# Altium PCB uMultimeter_ExpBreadBoard_Pcb.PcbDoc
Units mil, origin at the board's own origin, x right, y up, seen from the top; angles counter-clockwise.
Board outline 2100 x 2035 mil, 2 copper layers (Top Layer, Bottom Layer); 13 components, 23 nets, 65 pads, 6 vias.
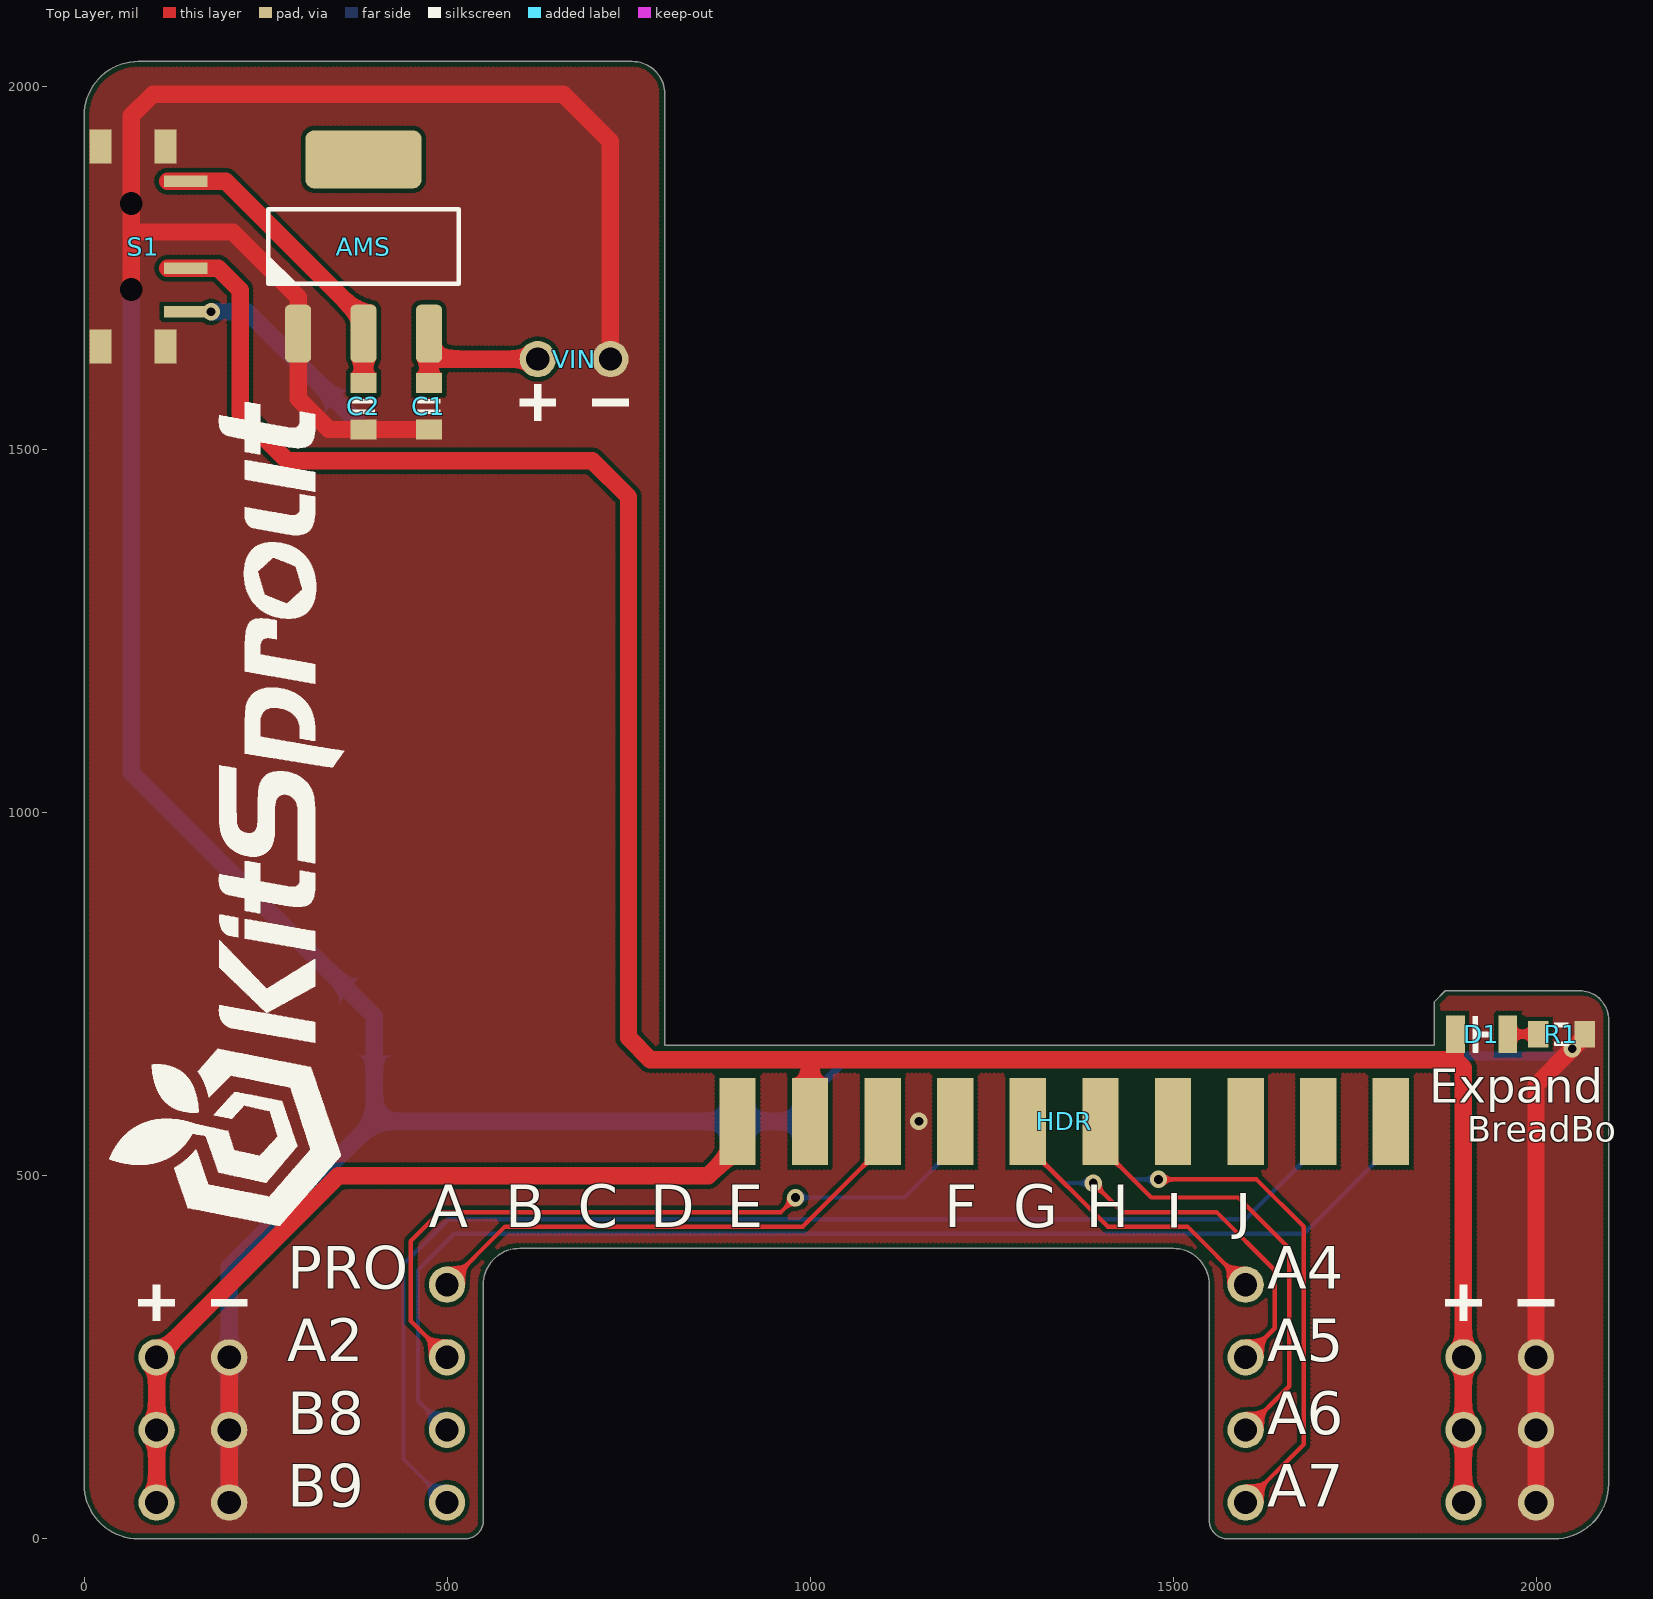
[diagram p0: Top Layer view]
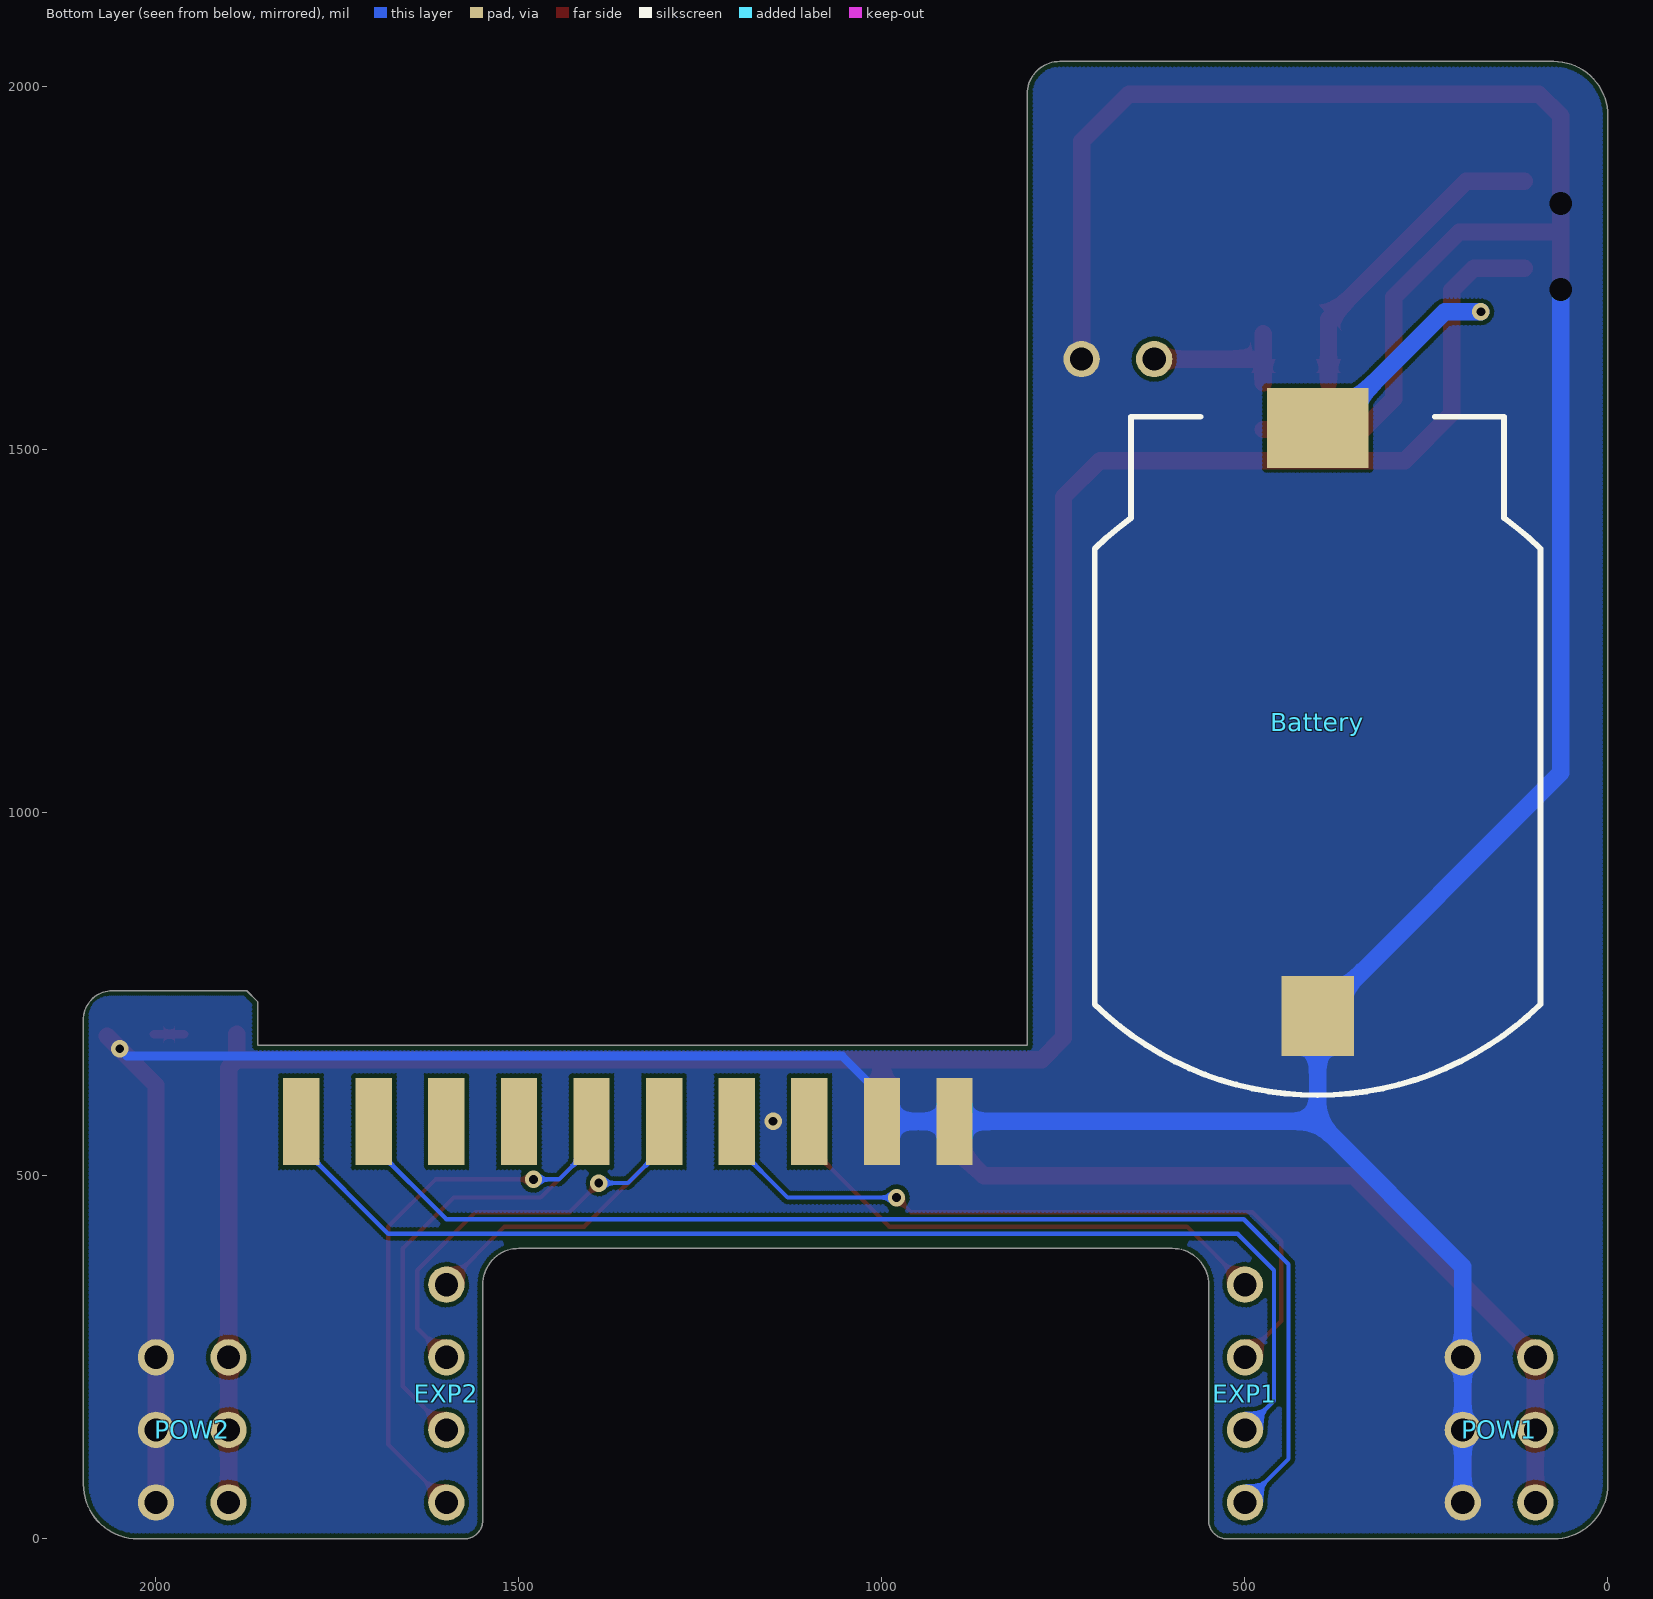
[diagram p1: Bottom Layer view, seen from below]
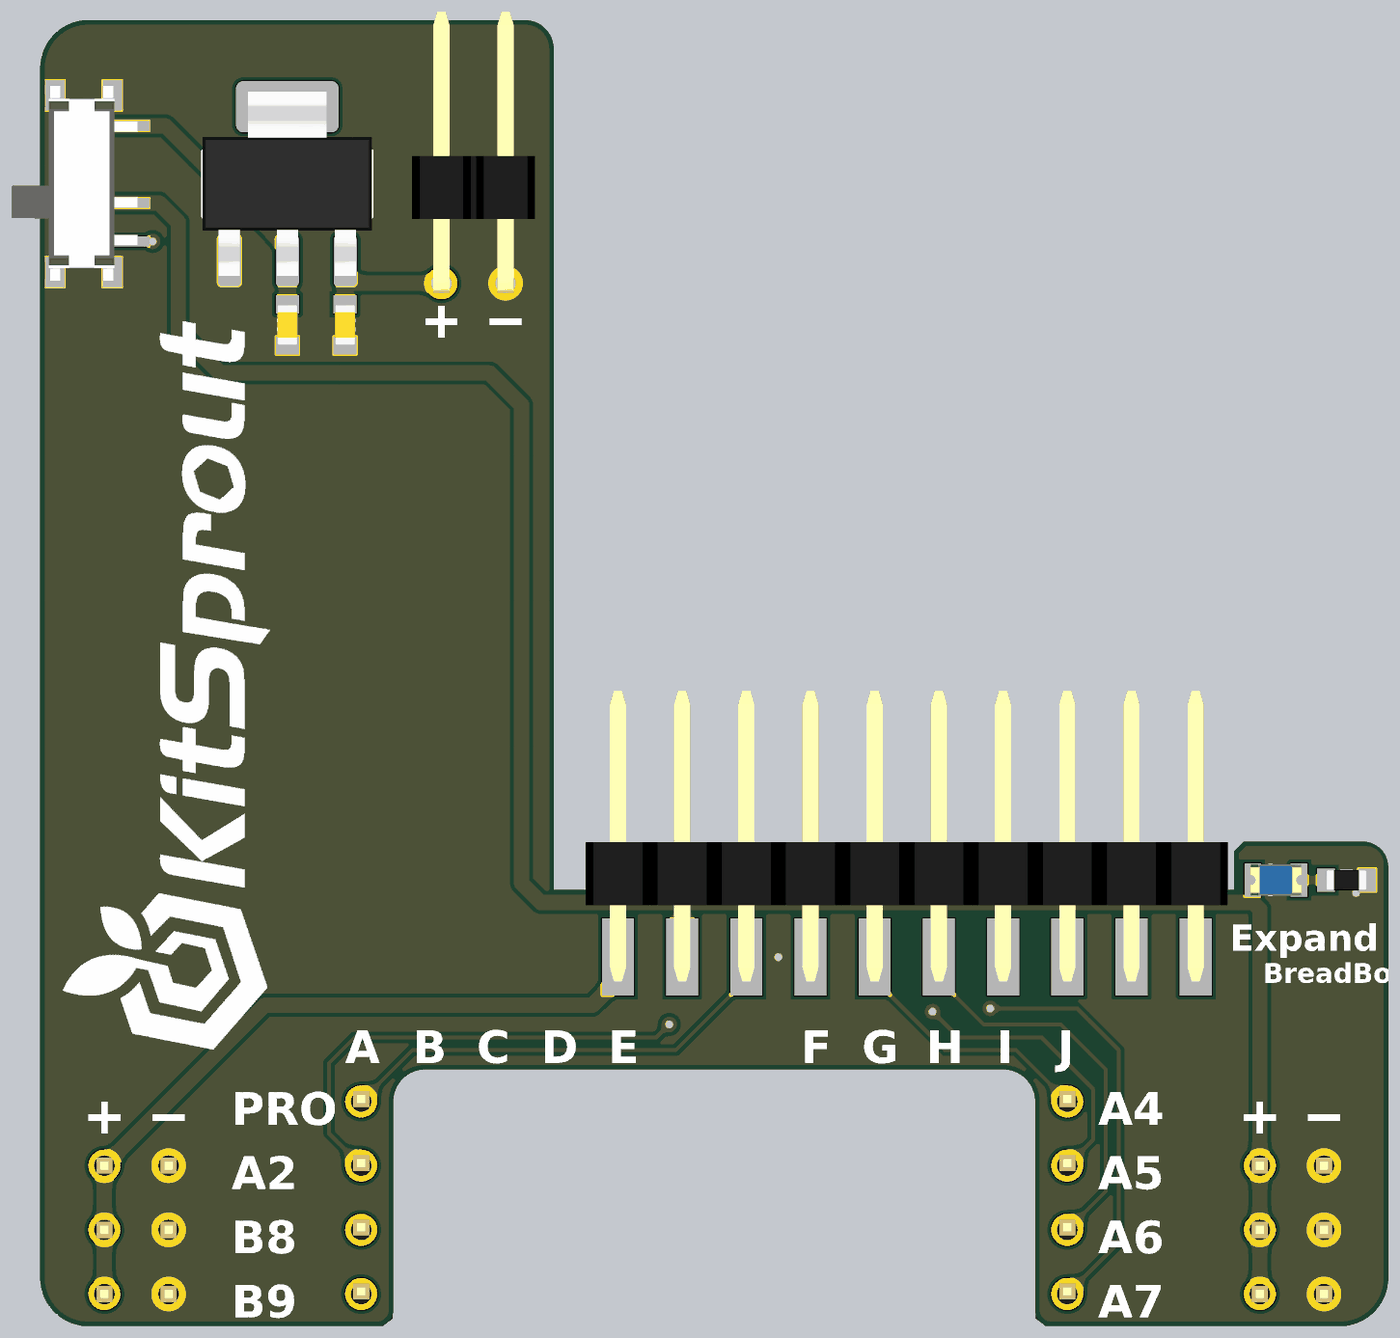
[diagram p2: 3D render of the assembled board from above, using the file's embedded part models]
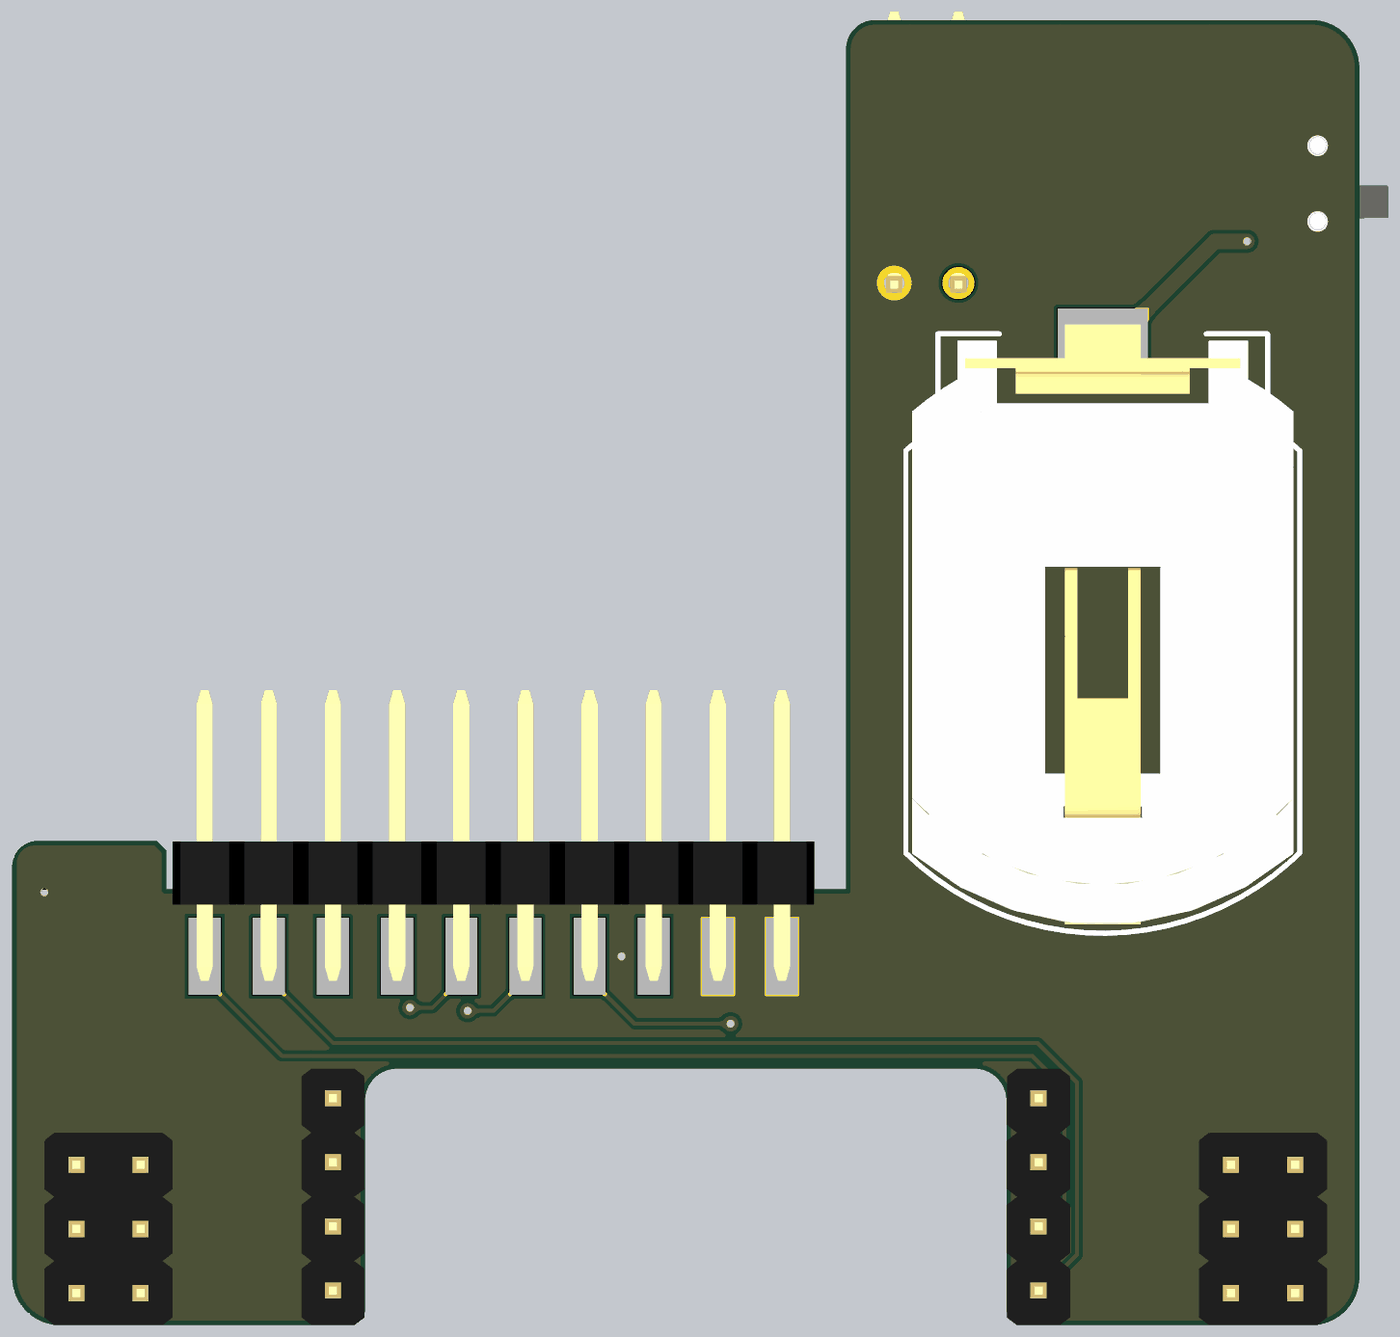
[diagram p3: 3D render of the assembled board from below, using the file's embedded part models]

## Layer stack, top to bottom
Top Solder: solder mask 0.4, Solder Resist, Dk 3.5
Top Layer: signal copper 1.4
Dielectric 1: dielectric 12.6, FR-4, Dk 4.8
Bottom Layer: signal copper 1.4
Bottom Solder: solder mask 0.4, Solder Resist, Dk 3.5

## Board outline
0,75 ccw(c75,75) 75,0 525,0 ccw(c525,25) 550,25 550,350 cw(c600,350) 600,400 1500,400 cw(c1500,350) 1550,350 1550,25 ccw(c1575,25) 1575,0 2025,0 ccw(c2025,75) 2100,75 2100,715 ccw(c2060,715) 2060,755 1875,755 1860,740 1860,680 800,680 800,1990 ccw(c755,1990) 755,2035 75,2035 ccw(c75,1960) 0,1960

## Design rules (kind name [scope] priority, off if disabled: settings)
Clearance ClearancePolygon [InPolygon] p1: gap=6
Clearance [All] p2: gap=6
ComponentClearance [All] p1: gap=0 collisioncheckmode=3 verticalgap=0 showdistances=FALSE
Height [All] p1: minheight=0 maxheight=5000 prefheight=500
HoleSize [All] p1: absolutevalues=TRUE maxlimit=200 minlimit=1 maxpercent=80.000 minpercent=20.000
HoleToHoleClearance [All] p1: gap=6 allowstackedmicrovias=TRUE
MinimumSolderMaskSliver [All] p1: minsoldermaskwidth=0
PolygonConnect [All] p1: connectstyle=Direct reliefconductorwidth=10 reliefentries=4 polygonreliefangle="90 Angle" airgapwidth=10
RoutingVias [All] p1: holewidth=12 width=24 viastyle="Through Hole" minholewidth=12 minwidth=20 maxholewidth=28 maxwidth=50
SilkToSilkClearance [All] p1: silktosilkclearance=0
SilkToSolderMaskClearance [IsPad] p1: minsilkscreentomaskgap=0 clearancetoexposedcopper=TRUE
SolderMaskExpansion [All] p1: expansion=2
Width [All] p1: maxlimit=50 minlimit=6 preferedwidth=10
23 further rules are at their usual default settings.

## Classes and differential pairs
component class EXP: HDR
component class uMultimeter_ExpBreadBoard_Sch: AMS Battery C1 C2 D1 EXP1 EXP2 POW1 POW2 R1 S1 VIN

## Components (designator, comment, footprint, x,y, rotation, side; value= is the part's Value field where it differs from the comment)
AMS "AMS1117" SOT223-3 385,1780 r0 top
Battery "Battery" CR2032-1 400,1050 r90 bottom locked
C1 "Cap_0603" CAP_0603 475,1560 r90 top
C2 "Cap_0603" CAP_0603 385,1560 r90 top
D1 "LED_0805" LED_0805_BLUE 1925,695 r0 top
EXP1 "HDR1x4_2.54" HDR1x4_2.54_180 500,350 r180 bottom
EXP2 "HDR1x4_2.54" HDR1x4_2.54_180 1600,350 r180 bottom
HDR "HDR2x10_2.54" HDR2X10_2.54_180H 900,575 r90 top locked
POW1 "HDR2x3_2.54" HDR2X3_2.54_180 200,250 r180 bottom
POW2 "HDR2x3_2.54" HDR2X3_2.54_180 2000,250 r180 bottom
R1 "Res_0603" RES_0603 2035,695 r0 top
S1 "SwitchSPDT_2.8x6.6_90" SwitchSPDT_2.8X6.6_90 65,1780 r270 top
VIN "HDR1x2_2.54" HDR1X2_2.54_90 625,1625 r90 top

## Footprints (in the part's own frame and the unit in brackets; to place one, negate y for a bottom-side part, rotate by r counter-clockwise, add the part's x,y. Pads: shape width x height; smd on the part's side, far side on the other; paste and mask are expansions set on the pad)
CAP_0603 [mil]
  rect 28x36 smd: 1(-32,0) 2(32,0)
  silkscreen extent -10,-16 10,16, body extent -31,-16 32,16, height 36
CR2032-1 [mil]
  rect 110x100 smd: 1(-330,0)
  rect 110x140 smd: 2(480,0)
  silkscreen extent -439,-307 496,307, body extent -425,-297 510,297, height 191
HDR1X2_2.54_90 [mil]
  round 50 hole 32: 1(0,0) 2(0,-100)
  body extent -15,-146 424,46, height 99
HDR1x4_2.54_180 [mil]
  round 50 hole 32: 1(0,0) 2(0,-100) 3(0,-200) 4(0,-300)
  body extent -49,-350 49,50, height 323
HDR2X3_2.54_180 [mil]
  round 50 hole 32: 1(0,0) 2(100,0) 3(0,-100) 4(100,-100) 5(0,-200) 6(100,-200)
  body extent -50,-250 150,50, height 335
HDR2X10_2.54_180H [mil]
  rect 120x50 smd: 1(0,0) 3(0,-100) 5(0,-200) 7(0,-300) 9(0,-400) 11(0,-500) 13(0,-600) 15(0,-700) 17(0,-800) 19(0,-900)
  rect 120x50 smd far side: 2(0,0) 4(0,-100) 6(0,-200) 8(0,-300) 10(0,-400) 12(0,-500) 14(0,-600) 16(0,-700) 18(0,-800) 20(0,-900)
  body extent -38,-950 415,50, height 100
LED_0805_BLUE [mil]
  rect 26x52 smd: 1(-36,0) 2(36,0)
  silkscreen extent -12,-24 12,24, body extent -40,-25 40,25, height 43
RES_0603 [mil]
  rect 28x36 smd: 1(-32,0) 2(32,0)
  silkscreen extent -10,-16 10,16, body extent -31,-16 32,16, height 20
SOT223-3 [mil]
  rrect40% 36x80 smd: 1(-90.16,-120) 2(0,-120) 3(90.16,-120)
  rrect30% 160x80 smd: 4(0,120)
  silkscreen extent -131,-51 131,51, body extent -132,-144 132,144, height 71
SwitchSPDT_2.8X6.6_90 [mm]
  rect 1.2x0.762 smd: 0(-3.5,-1.073) 0(-3.5,1.2) 0(3.5,-1.073) 0(3.5,1.2)
  round 0.254 hole 0.8: 0(-1.5,0) 0(1.5,0)
  rect 0.4x1.524 smd: 1(2.286,1.905) 2(0.762,1.905) 3(-2.286,1.905)
  body extent -3.87,-2.81 3.83,2.19, height 1.4

## Part data
AMS: "Power"
C1 C2: "Capacitor"
D1: "LED"
EXP1: library part HDR1x4_2.54T, "Header"
EXP2 HDR POW1 POW2: "Header"
R1: "Resistor"
S1: "Switch"
VIN: library part HDR1x2_2.54T, "Header"

## Via types
v1: diameter 24, hole 12, Top Layer to Bottom Layer, 6 vias

## Nets (pads, with @x,y where several pads share a name; then routed paths per layer and width w, separated by ;. In a path a pad name is that pad's centre, name@x,y a point inside that pad or via, vN(x,y) a via of type N, cw(c..) or ccw(c..) an arc to the next point about the centre after c; other vN are vias at no path point)
3V3: D1.1 HDR.3 POW2.2 POW2.4 POW2.6 S1.2 | length 3515
  Top Layer w12: 1889,660 D1.1@1889,679
  Top Layer w24: S1.2@115,1750 185,1750 215,1720 215,1550 280,1485 700,1485 750,1435 750,690 780,660 1000,660 ; HDR.3 1000,660 ; D1.1 1889,660 ; POW2.6 POW2.4 POW2.2 1900,649 1889,660 ; 1000,660 1889,660
5V: HDR.1 POW1.2 POW1.4 POW1.6 | length 1155.1
  Top Layer w24: POW1.6 POW1.4 POW1.2 350,500 860,500 900,540 HDR.1
EVDD: AMS.2 C2.2 S1.3 | length 436.7
  Top Layer w24: S1.3@115,1870 195,1870 385,1680 C2.2
EXP_01: HDR.6
EXP_02: HDR.7
EXP_03: EXP1.2 HDR.8 | length 1019.6
  Top Layer w6: EXP1.2 450,300 450,410 490,450 960,450 v1(980,470)
  Bottom Layer w6: v1(980,470) 1130,470 1200,540 HDR.8
EXP_04: EXP2.1 HDR.9 | length 413.7
  Top Layer w6: HDR.9 1300,540 1410,430 1520,430 EXP2.1
EXP_05: EXP2.2 HDR.10 | length 582
  Top Layer w6: v1(1390,490) 1430,450 1560,450 1640,370 1640,290 EXP2.2
  Bottom Layer w6: HDR.10 1300,540 1350,490 v1(1390,490)
EXP_06: EXP2.3 HDR.11 | length 627.8
  Top Layer w6: HDR.11 1400,540 1470,470 1590,470 1660,400 1660,210 EXP2.3
EXP_07: EXP2.4 HDR.12 | length 773.7
  Top Layer w6: v1(1480,495) 1615,495 1680,430 1680,130 EXP2.4
  Bottom Layer w6: HDR.12 1400,540 1445,495 v1(1480,495)
EXP_08: HDR.13
EXP_09: HDR.14
EXP_10: HDR.15
EXP_11: HDR.16
EXP_12: HDR.17
EXP_13: EXP1.4 HDR.18 | length 1715.1
  Bottom Layer w6: EXP1.4 440,110 440,378.28 501.72,440 1600,440 1700,540 HDR.18
EXP_14: HDR.19
EXP_15: EXP1.3 HDR.20 | length 1682
  Bottom Layer w6: EXP1.3 460,190 460,370 510,420 1680,420 1800,540 HDR.20
GND: AMS.1 Battery.1 C1.1 C2.1 HDR.2 HDR.4 POW1.1 POW1.3 POW1.5 POW2.1 POW2.3 POW2.5 R1.2 S1.0 VIN.2 | length 6317.3
  Top Layer w24: S1.0@65,1720.94 65,1800 ; POW1.5 POW1.3 POW1.1 ; C1.1 C2.1 337,1528 294.84,1570.16 AMS.1 294.84,1710.16 205,1800 65,1800 ; VIN.2 725,1925 660,1990 95,1990 65,1960 65,1839.06 65,1800 ; POW2.5 POW2.3 POW2.1 2000,625 v1(2050,675) R1.2@2067,692
  Bottom Layer w12: HDR.4 1000,610 1055,665 2040,665 v1(2050,675)
  Bottom Layer w24: S1.0@65,1720.94 65,1055 Battery.1 400,575 ; POW1.5 POW1.3 POW1.1 200,375 400,575 ; HDR.4 HDR.2 400,575
  other v1: 1150,575
NetAMS_3: AMS.3 C1.2 VIN.1 | length 252.8
  Top Layer w24: C1.2 AMS.3@475,1660 ; AMS.3 475.16,1625 VIN.1
NetD1_2: D1.2 R1.1 | length 42
  Top Layer w12: D1.2 R1.1
PROBE: EXP1.1 HDR.5 | length 713.7
  Top Layer w6: EXP1.1 580,430 990,430 1100,540 HDR.5
VBAT: Battery.2 S1.1 | length 269.2
  Bottom Layer w24: v1(175,1690) 225,1690 Battery.2@380,1535
pads on no net: AMS.4

## Polygon pours and split planes (outlines as drawn)
GND on Top Layer "Top Layer-No Net" (hatched 45Degree grid 4 track 6, remove dead copper, pour order 0): 790,1975 790,1990 ccw(c755,1990) 755,2025 75,2025 ccw(c75,1960) 10,1960 10,75 ccw(c75,75) 75,10 525,10 ccw(c525,25) 540,25 540,350 cw(c600,350) 600,410 1500,410 cw(c1500,350) 1560,350 1560,25 ccw(c1575,25) 1575,10 2025,10 ccw(c2025,75) 2090,75 2090,720 ccw(c2065,720) 2065,745 1880,745 1870,735 1870,720 1870,675 1865,670 1855,670 795,670 790,675
GND on Bottom Layer "Top Layer-No Net" (hatched 45Degree grid 4 track 6, remove dead copper, pour order 2): 790,1975 790,1990 ccw(c755,1990) 755,2025 75,2025 ccw(c75,1960) 10,1960 10,75 ccw(c75,75) 75,10 525,10 ccw(c525,25) 540,25 540,350 cw(c600,350) 600,410 1500,410 cw(c1500,350) 1560,350 1560,25 ccw(c1575,25) 1575,10 2025,10 ccw(c2025,75) 2090,75 2090,720 ccw(c2065,720) 2065,745 1880,745 1870,735 1870,720 1870,675 1865,670 1855,670 795,670 790,675

## Silkscreen, mask and mechanical layers (free items; w line width, h text height)
Top Overlay:
  drawing of 5034 lines, arcs and shapes, not listed
  text "Expand" at 1853.07,585 h80
  text "BreadBo" at 1905,535 h60
  text "A" at 475,410 h100
  text "B" at 580,410 h100
  text "C" at 680,410 h100
  text "D" at 780,410 h100
  text "E" at 885,410 h100
  text "F" at 1185,410 h100
  text "G" at 1280,410 h100
  text "H" at 1380,410 h100
  text "I" at 1490,410 h100
  text "J" at 1585,410 h100
  text "PRO" at 280,325 h100
  text "A4" at 1630,325 h100
  text "A2" at 280,225 h100
  text "A5" at 1630,225 h100
  text "B8" at 280,125 h100
  text "A6" at 1630,125 h100
  text "B9" at 280,25 h100
  text "A7" at 1630,25 h100
Mechanical 1:
  lines w2: 1985,0 2100,0 2100,155 ; 0,75 ccw(c75,75) 75,0 525,0 ccw(c525,25) 550,25 550,350 cw(c600,350) 600,400 1500,400 cw(c1500,350) 1550,350 1550,25 ccw(c1575,25) 1575,0 2025,0 ccw(c2025,75) 2100,75 2100,715 ccw(c2060,715) 2060,755 1875,755 1860,740 1860,680 800,680 800,1990 ccw(c755,1990) 755,2035 75,2035 ccw(c75,1960) 0,1960 0,75